# Allegro board sensor.brd
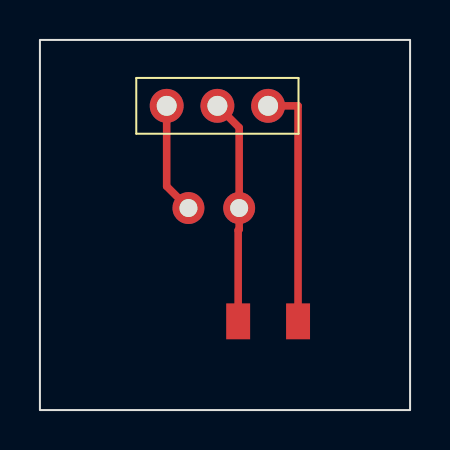
[diagram p0: board, top side]
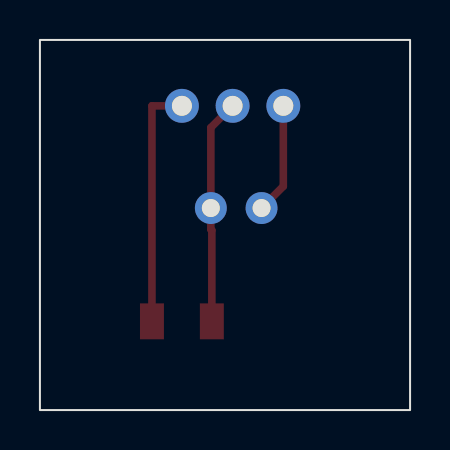
[diagram p1: board, bottom side, seen from below]

Outline 18.54 x 18.54 mm; copper layers: TOP, BOTTOM. Coordinates in mm from the lower left corner of the outline.
Outline path: rectangle 0,0 18.54,18.54

## Design rules (mm)
constraint set DEFAULT: min track width 0.127

## Placement (name value [footprint] x y rotation side)
D5  LED  [LED_T1]  2.54 7.62 0 top
J1  CON3  [CONN3]  6.35 15.24 90 top
R12  100K  [SMD_RES_1206]  11.43 4.45 0 top

## Library data of the parts
D5 = LED
J1 = CON3
R12 = R

## Footprints (pads in the part's own frame, mm; a bottom-side part is the same pattern mirrored in y, then rotated)
CONN3
  round 1.7 hole 1: 1(0,0) 2(0,-2.54) 3(0,-5.08)
LED_T1
  round 1.6 hole 0.9: 1(7.44,2.5) 2(4.9,2.5)
SMD_RES_1206
  rect 1.2x1.8 smd: 1(-1.5,0) 2(1.5,0)

## Nets
VIN: D5.2 J1.1
0: J1.3 R12.2
N134074: D5.1(CATHODE) J1.2 R12.1

## Routing (per net, layer and track width the routed paths; a pad name or vN(x,y) marks a point on that pad's centre or on a via; arc(x,y) is an arc through that point)
VIN: length 5.6
  TOP w0.381: D5.2 6.35,11.21 J1.1
0: length 12.3
  TOP w0.381: R12.2 12.93,15.24 J1.3
N134074: length 11.3
  TOP w0.381: J1.2 9.98,14.15 D5.1 9.98,9.05 9.93,9 R12.1
